# Altium PCB AIOESM.PcbDoc
Units mil, origin at the board's own origin, x right, y up, seen from the top; angles counter-clockwise.
Board outline 2558.74 x 2204.72 mil, 2 copper layers (Top Layer, Bottom Layer), stack 61.2 mil thick; 37 components, 40 nets, 175 pads, 0 vias.
Unrouted connection lines stored in the file: 105.
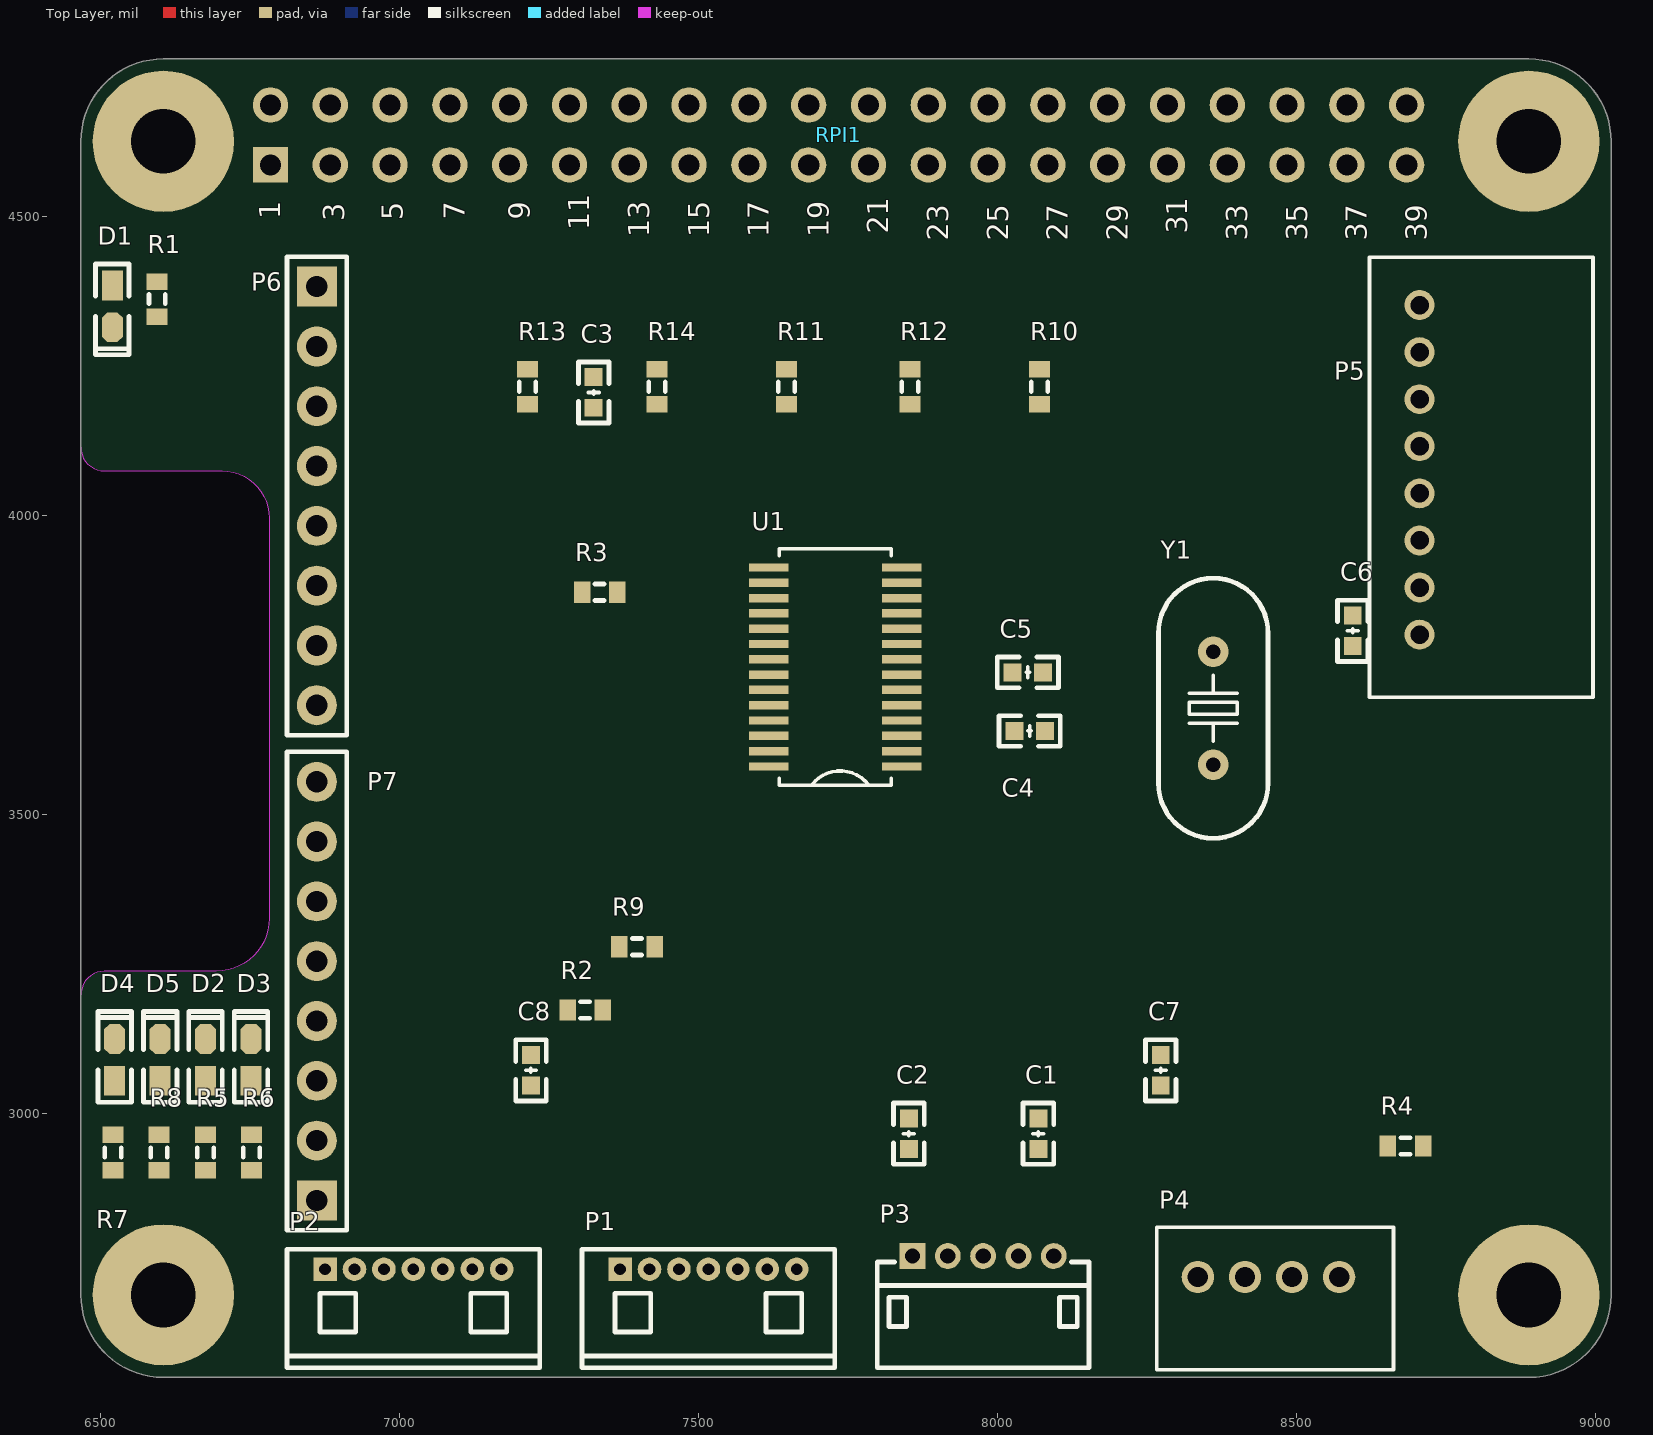
[diagram p0: Top Layer view]
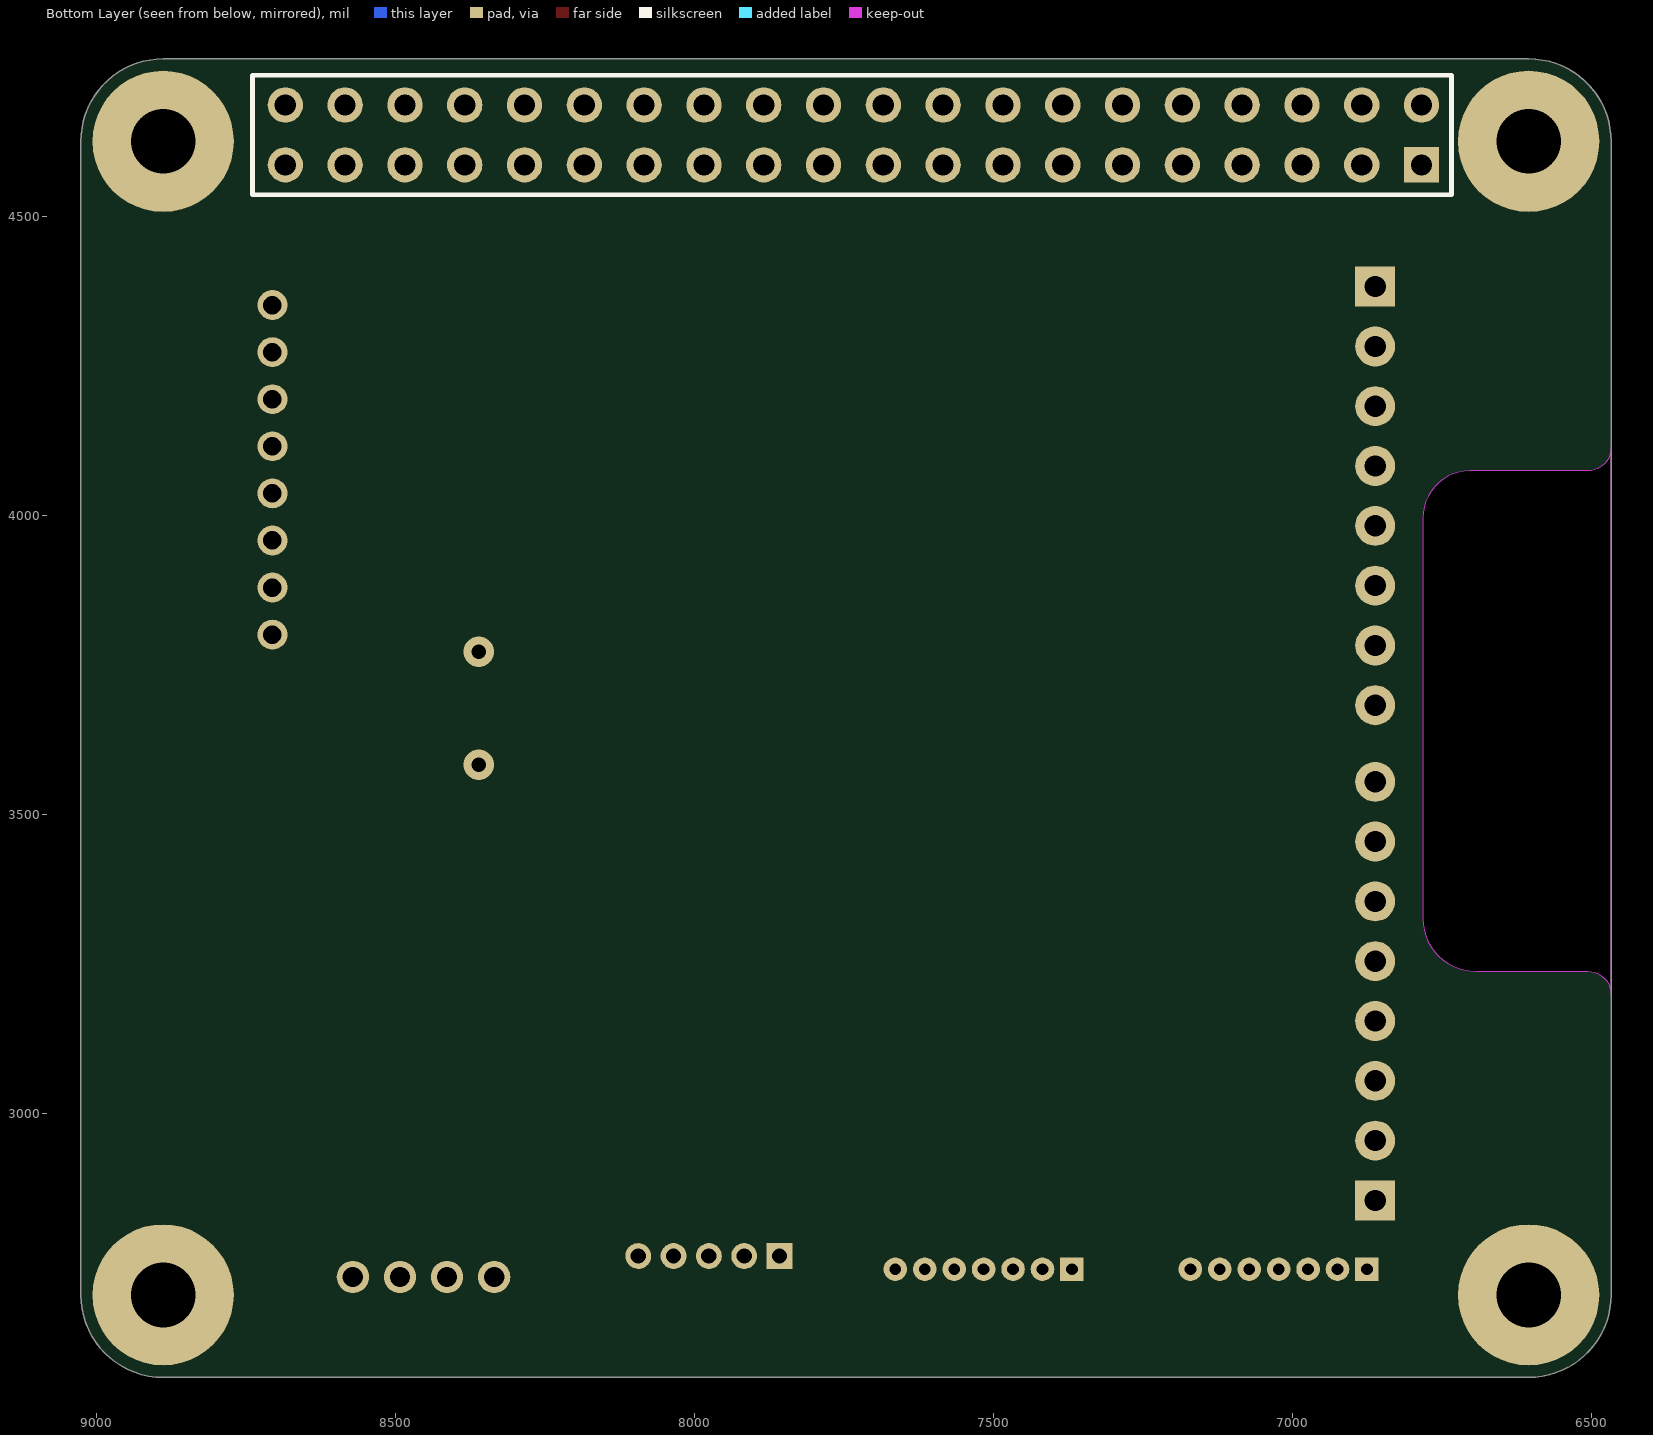
[diagram p1: Bottom Layer view, seen from below]

## Layer stack, top to bottom
Top Solder: solder mask 0.8, Solder Resist, Dk 3.5
Top Layer: signal copper 2.1
Dielectric 1: dielectric 57, FR-4, Dk 4.6
Bottom Layer: signal copper 2.1
Bottom Solder: solder mask 0.8, Solder Resist, Dk 3.5

## Board outline
6466.54,2696.85 ccw(c6604.33,2696.85) 6604.33,2559.06 8887.8,2559.06 ccw(c8887.64,2696.69) 9025.28,2696.85 9025.28,4625.98 ccw(c8887.64,4626.14) 8887.8,4763.78 6604.33,4763.78 ccw(c6604.33,4625.98) 6466.54,4625.98
cut-out: 6466.54,3198.82 6466.54,4114.17 ccw(c6505.9,4114.17) 6505.9,4074.8 6702.76,4074.8 cw(c6702.76,3996.06) 6781.5,3996.06 6781.5,3326.77 cw(c6692.92,3326.77) 6692.91,3238.19 6505.91,3238.19 ccw(c6505.9,3198.82)

## Design rules (kind name [scope] priority, off if disabled: settings)
Clearance [All] p1: gap=10 ignorepadtopadclearanceinfootprint=FALSE except(0: Arc-Hole Track-Hole SMDPad-Hole THPad-Hole Via-Hole Fill-Hole Poly-Hole Region-Hole Text-Hole)
PolygonConnect [All] p1: connectstyle=Relief reliefconductorwidth=10 reliefentries=4 polygonreliefangle="90 Angle" airgapwidth=10
RoutingVias [All] p1: holewidth=28 width=50 viastyle="Through Hole" minholewidth=28 minwidth=50 maxholewidth=28 maxwidth=50
SolderMaskExpansion [All] p1: expansion=4
Width [All] p1: maxlimit=10 minlimit=10 preferedwidth=10
30 further rules are at their usual default settings.

## Components (designator, comment, footprint, x,y, rotation, side; value= is the part's Value field where it differs from the comment)
C1 "Cap" "C 0603_L" 8067.64,2966.5 r90 top value=33pF
C2 "Cap" "C 0603_L" 7851.1,2966.5 r90 top value=0.1uF
C3 "Cap" "C 0603_L" 7324,4206 r270 top value=33pF
C4 "Cap" "C 0603_L" 8053,3640 r0 top value=22pF
C5 "Cap" "C 0603_L" 8050,3738 r0 top value=33pF
C6 "Cap" "C 0603_L" 8593.33,3807.5 r90 top value=33pF
C7 "Cap" "C 0603_L" 8272.23,3072.5 r90 top value=33pF
C8 "Cap" "C 0603_L" 7219.08,3072.5 r90 top value=33pF
D1 "LED2" "LED 0603Y" 6519,4350 r270 top
D2 "LED2" "LED 0603Y" 6675,3090 r90 top
D3 "LED2" "LED 0603Y" 6751,3090 r90 top
D4 "LED2" "LED 0603Y" 6523,3090 r90 top
D5 "LED2" "LED 0603Y" 6599,3090 r90 top
P1 "HDR-1X7" "MX 1.25-WI-7P" 7515.78,2739.94 r0 top
P2 "HDR-1X7" "MX 1.25-WI-7P" 7022.43,2739.94 r0 top
P3 "HDR-1X5" ZH1.5-WI-5P 7975.18,2762.01 r0 top
P4 "H/T" "PH2.0MM- 4" 8570.48,2727 r180 top
P5 "e-ink" PH2.0MM-8 8705,3801.04 r90 top
P6 "HDR-1X8" HDR2.54-LI-8P 6861,4033 r270 top
P7 "HDR-1X8" HDR2.54-LI-8P 6861,3205 r90 top
R1 "Res3" J1-0603 6594,4362 r90 top value=1K
R2 "Res3" J1-0603 7309.77,3173.19 r0 top value=10K
R3 "Res3" J1-0603 7334,3872 r0 top value=1K
R4 "Res3" J1-0603 8681.53,2946 r0 top value=1K
R5 "Res3" J1-0603 6674.67,2935 r90 top value=1K
R6 "Res3" J1-0603 6752,2935 r90 top value=1K
R7 "Res3" J1-0603 6520,2935 r90 top value=1K
R8 "Res3" J1-0603 6597.33,2935 r90 top value=1K
R9 "Res3" J1-0603 7396.24,3279.19 r0 top value=1K
R10 "Res3" J1-0603 8069.42,4215.66 r90 top value=1K
R11 "Res3" J1-0603 7646.19,4215.66 r90 top value=1K
R12 "Res3" J1-0603 7852.89,4215.66 r90 top value=1K
R13 "Res3" J1-0603 7213.12,4215.66 r90 top value=1K
R14 "Res3" J1-0603 7429.66,4215.66 r90 top value=1K
RPI1 "RPI GPIO Connector" rasp-pi40pin 6783.46,4586.61 r0 top
U1 "SC16IS752" TSSOP28 7728,3746.98 r180 top
Y1 "1.8432M" "OSC HC-49U" 8360,3678 r90 top

## Footprints (in the part's own frame and the unit in brackets; to place one, negate y for a bottom-side part, rotate by r counter-clockwise, add the part's x,y. Pads: shape width x height; smd on the part's side, far side on the other; paste and mask are expansions set on the pad)
"C 0603_L" [mil] "无极性贴片电容                                       淘宝ID:黄晶宝石"
  rect 30x30 smd: 1(-25.59,0) 2(25.59,0)
  silkscreen extent -51,-26 51,26, body extent -31,-16 31,16, height 32
HDR2.54-LI-8P [mm] "排针，8脚  淘宝ID:黄晶宝石   店铺网址:https://shop463601444.taobao.com"
  rect 1.7x1.7 hole 0.9: 1(-8.89,0)
  round 1.7 hole 0.9: 2(-6.35,0) 3(-3.81,0) 4(-1.27,0) 5(1.27,0) 6(3.81,0) 7(6.35,0) 8(8.89,0)
  silkscreen extent -10.16,-1.27 10.16,1.27, body extent -10.16,-1.27 10.16,1.27, height 8.5
J1-0603 [mm] "Chip Resistor, Body 1.6x0.8mm, IPC High Density"
  rect 0.7x0.9 smd: 1(-0.75,0) 2(0.75,0)
  silkscreen extent -0.2,-0.35 0.2,0.35, body extent -0.85,-0.48 0.85,0.48, height 0.9
"LED 0603Y" [mil] "黄色0603LED                              淘宝ID:黄晶宝石"
  rect 50x35 smd: 1(-35,0)
  oct 50x35 smd: 2(35,0)
  silkscreen extent -71,-28 81,28, body extent -32,-16 31,16, height 18
"MX 1.25-WI-7P" [mm] "长：10.5mm，宽：1.8mm，高：3.3mm"
  rect 1x1 hole 0.5: 1(-3.75,0)
  round 1 hole 0.5: 2(-2.5,0) 3(-1.25,0) 4(0,0) 5(1.25,0) 6(2.5,0) 7(3.75,0)
  silkscreen extent -5.36,-4.19 5.36,0.85, body extent -5.25,-4.05 5.25,0.85, height 3.35
"OSC HC-49U" [mm] "封装库来自淘宝卖家 ID：黄晶宝石"
  round 1.3 hole 0.6: 1(-2.4,0) 2(2.4,0)
  silkscreen extent -5.52,-2.32 5.52,2.33, body extent -5.53,-2.33 5.52,2.32, height 13.95
PH2.0MM-8 [mil] "E-INK connector"
  round 50 hole 31: 1(0,0) 2(78.74,0) 3(157.48,0) 4(236.22,0) 5(314.96,0) 6(393.7,0) 7(472.44,0) 8(551.18,0)
  silkscreen extent -105,-290 631,84, body extent -86,-278 615,68, height 250
"PH2.0MM- 4" [mil] "TEMP/HUMIDIT connector"
  round 54 hole 34: 1(0,0) 2(78.74,0) 3(157.48,0) 4(236.22,0)
  silkscreen extent -91,-83 305,155, body extent -88,-78 298,150, height 276
rasp-pi40pin [mm]
  rect 1.5x1.5 hole 0.9: 1(0,0)
  round 1.5 hole 0.9: 2(0,2.54) 3(2.54,0) 4(2.54,2.54) 5(5.08,0) 6(5.08,2.54) 7(7.62,0) 8(7.62,2.54) 9(10.16,0) 10(10.16,2.54) 11(12.7,0) 12(12.7,2.54) 13(15.24,0) 14(15.24,2.54) 15(17.78,0) 16(17.78,2.54) 17(20.32,0) 18(20.32,2.54) 19(22.86,0) 20(22.86,2.54) 21(25.4,0) 22(25.4,2.54) 23(27.94,0) 24(27.94,2.54) 25(30.48,0) 26(30.48,2.54) 27(33.02,0) 28(33.02,2.54) 29(35.56,0) 30(35.56,2.54) 31(38.1,0) 32(38.1,2.54) 33(40.64,0) 34(40.64,2.54) 35(43.18,0) 36(43.18,2.54) 37(45.72,0) 38(45.72,2.54) 39(48.26,0) 40(48.26,2.54)
  body extent -1.4,-1.11 49.65,3.9, height 8.5
TSSOP28 [mil]
  rect 66x14 smd: 1(-111,166.34) 2(-111,140.75) 3(-111,115.16) 4(-111,89.57) 5(-111,63.98) 6(-111,38.39) 7(-111,12.8) 8(-111,-12.8) 9(-111,-38.39) 10(-111,-63.98) 11(-111,-89.57) 12(-111,-115.16) 13(-111,-140.75) 14(-111,-166.34) 15(111,-166.34) 16(111,-140.75) 17(111,-115.16) 18(111,-89.57) 19(111,-63.98) 20(111,-38.39) 21(111,-12.8) 22(111,12.8) 23(111,38.39) 24(111,63.98) 25(111,89.57) 26(111,115.16) 27(111,140.75) 28(111,166.34)
  silkscreen extent -94,-198 94,198, body extent -126,-191 126,191, height 45
ZH1.5-WI-5P [mm] "长：9.0，宽：4.5，高：3.6"
  rect 1.1x1.1 hole 0.65: 1(-3,0)
  round 1.1 hole 0.65: 2(-1.5,0) 3(0,0) 4(1.5,0) 5(3,0)
  silkscreen extent -4.5,-4.75 4.5,-0.25, body extent -4.5,-4.75 4.5,0.25, height 3.65

## Part data
C1 C2 C3 C4 C5 C6 C7 C8: "Capacitor", LatestRevisionDate=17-Jul-2002, LatestRevisionNote="Re-released for DXP Platform.", PackageDescription="Radial Cap, Thru-Hole; 2 Leads; 0.3 in Pin Spacing", PackageReference=RAD-0.3, Published=8-Jun-2000, Publisher="Altium Limited"
D1 D2 D3 D4 D5: "Typical RED, GREEN, YELLOW, AMBER GaAs LED", LatestRevisionDate=17-Jul-2002, LatestRevisionNote="Re-released for DXP Platform.", PackageDescription="SM LED; 2 Flat Leads", PackageReference=3.2X1.6X1.1, PackageVersion=Feb-2002, Published=8-Jun-2000, Publisher="Altium Limited"
P1 P2: library part "Header 7", "7P接插件"
  P2: BOM名称=7P接, 学习资源=https://shop463601444.taobao., 版权归属=封装库来自淘
P3: library part "Header 5", "5P接插件", BOM名称=5P接, 学习资源=封装库来自淘, 版权归属=https://shop463601444.taobao.
P4: library part "Header 4", "Header, 4-Pin", LatestRevisionDate=17-Jul-2002, LatestRevisionNote="Re-released for DXP Platform.", Publisher="Altium Limited"
P5: library part "Header 8", "Header, 8-Pin", LatestRevisionDate=17-Jul-2002, LatestRevisionNote="Re-released for DXP Platform.", Publisher="Altium Limited"
P6 P7: library part "Header 8", "8P接插件"
R1 R2 R3 R4 R5 R6 R7 R8 R9 R10 R11 R12 R13 R14: "Resistor", LatestRevisionDate=29-May-2009, LatestRevisionNote="IPC-7351 Footprint Added.", PackageDescription="Chip Resistor", PackageReference=J1-0603, Published=8-Jun-2000, Publisher="Altium Limited"
RPI1: library part "rpi connector", "GPIO Header for Raspberry Pi A+/B+/Pi 2/Pi 3 - 2x20", Manufacturer="SparkFun Electronics", Manufacturer Part Number=PRT-14017, Supplier Part Number 1=1568-1462-ND, Accessory Type=Connector, Category="Development Boards, Kits, Programmers", ComponentLink1Description=https://cdn.sparkfun.com/datasheets/Dev/RaspberryPi/12313.pdf, ComponentLink1URL=https://cdn.sparkfun.com/datasheets/Dev/RaspberryPi/12313.pdf, For Use With/Related Products="Raspberry Pi", Nils Minor=author, nilsminor@web.de=mail, Part Status=Active, Pricing 1="1=1.84 (EUR)", RoHS="RoHS Compliant", Stock 1=150, Supplier 1=Digi-Key
Y1: library part XTAL, "Crystal Oscillator", LatestRevisionDate=17-Jul-2002, LatestRevisionNote="Re-released for DXP Platform.", PackageDescription="Crystal, Thru-Hole; 2 Leads; Body 3.1 x 8.2 mm (Dia.xH)", PackageReference=R38, Published=8-Jun-2000, Publisher="Altium Limited"

## Free pads (board coordinates)
  round 236.22 hole 108.27: ""(6604.33,2696.85) ""(6604.33,4625.98) ""(8887.8,2696.85) ""(8887.8,4625.98)

## Nets (pads, with @x,y where several pads share a name; then routed paths per layer and width w, separated by ;. In a path a pad name is that pad's centre, name@x,y a point inside that pad or via, vN(x,y) a via of type N, cw(c..) or ccw(c..) an arc to the next point about the centre after c; other vN are vias at no path point)
+3.3V: C2.1 C8.2 P5.1 R1.1 R2.1 R3.1 R4.1 R5.1 R6.1 R7.1 R8.1 R9.1 R10.1 R11.1 R13.1 RPI1.1 RPI1.17 U1.8
+5V: C1.1 C3.1 C6.2 C7.2 P1.4 P2.4 P3.1 P4.2 RPI1.2 RPI1.4
A0: R11.2 R12.1 U1.10
A1: R13.2 R14.1 U1.11
CTSA: P7.2 U1.2
CTSB: P7.6 U1.16
exGPIO0: P6.1 U1.18
exGPIO1: P6.2 U1.19
exGPIO2: P6.3 U1.20
exGPIO3: P6.4 U1.21
exGPIO4: P6.5 U1.25
exGPIO5: P6.6 U1.26
exGPIO6: P6.7 U1.27
exGPIO7: P6.8 U1.28
GND: C1.2 C2.2 C3.2 C4.2 C5.2 C6.1 C8.1 D1.2 P1.3 P2.3 P3.4 P3.5 P4.3 P5.2 R12.2 R14.2 RPI1.6 RPI1.9 RPI1.14 RPI1.20 RPI1.25 RPI1.30 RPI1.34 RPI1.39 U1.22
GPIO11: P5.3 RPI1.23
GPIO21: P5.4 RPI1.29
GPIO22: P5.5 RPI1.31
GPIO23: P5.6 RPI1.33
GPIO24: P5.7 RPI1.35
GPIO25: P5.8 RPI1.37
NetC4_1: C4.1 U1.6 Y1.1
NetC5_1: C5.1 U1.7 Y1.2
NetD1_1: D1.1 R1.2
NetD2_1: D2.1 R5.2
NetD3_1: D3.1 R6.2
NetD4_1: D4.1 R7.2
NetD5_1: D5.1 R8.2
NetP2_1: P2.1 RPI1.11
NetR2_2: R2.2 U1.5
NetR3_2: R3.2 U1.15
NetR4_2: R4.2 U1.9
RTSA: P7.1 U1.1
RTSB: P7.5 U1.17
RXA: D2.2 P1.6 P7.3 U1.4
RXB: D4.2 P2.6 P7.7 U1.24
SCL_Pi: P3.2 P4.1 R9.2 RPI1.5 U1.13
SDA_Pi: P3.3 P4.4 R10.2 RPI1.3 U1.14
TXA: D3.2 P1.5 P7.4 U1.3
TXB: D5.2 P2.5 P7.8 U1.23
pads on no net: C7.1 P1.1 P1.2 P1.7 P2.2 P2.7 RPI1.7 RPI1.8 RPI1.10 RPI1.12 RPI1.13 RPI1.15 RPI1.16 RPI1.18 RPI1.19 RPI1.21 RPI1.22 RPI1.24 RPI1.26 RPI1.27 RPI1.28 RPI1.32 RPI1.36 RPI1.38 RPI1.40 U1.12

## Silkscreen, mask and mechanical layers (free items; w line width, h text height)
Top Overlay:
  text "1" at 6800,4496 h35 r90
  text "7" at 7108,4495 h35 r90
  text "9" at 7216.93,4495 h35 r90
  text "5" at 7005,4494 h35 r90
  text "3" at 6907,4492 h35 r90
  text "11" at 7316.93,4477.51 h35 r90
  text "21" at 7816.93,4471.67 h35 r90
  text "31" at 8316.93,4471.67 h35 r90
  text "13" at 7416.93,4465.84 h35 r90
  text "15" at 7516.93,4465.84 h35 r90
  text "17" at 7616.93,4465.84 h35 r90
  text "19" at 7716.93,4465.84 h35 r90
  text "23" at 7916.93,4460.01 h35 r90
  text "25" at 8016.93,4460.01 h35 r90
  text "27" at 8116.93,4460.01 h35 r90
  text "29" at 8216.93,4460.01 h35 r90
  text "33" at 8416.93,4460.01 h35 r90
  text "35" at 8516.93,4460.01 h35 r90
  text "37" at 8616.93,4460.01 h35 r90
  text "39" at 8716.93,4460.01 h35 r90
M2: Outline:
  the board outline again, w10